# Altium PCB gamekun_H7A3.PcbDoc (part 2 of 2)
Units mil, origin at the board's own origin, x right, y up, seen from the top; angles counter-clockwise.
Board outline 2995 x 3909 mil, 4 copper layers (Top Layer, Layer 1, Layer 2, Bottom Layer), stack 23.756 mil thick; 100 components, 120 nets, 610 pads, 229 vias.
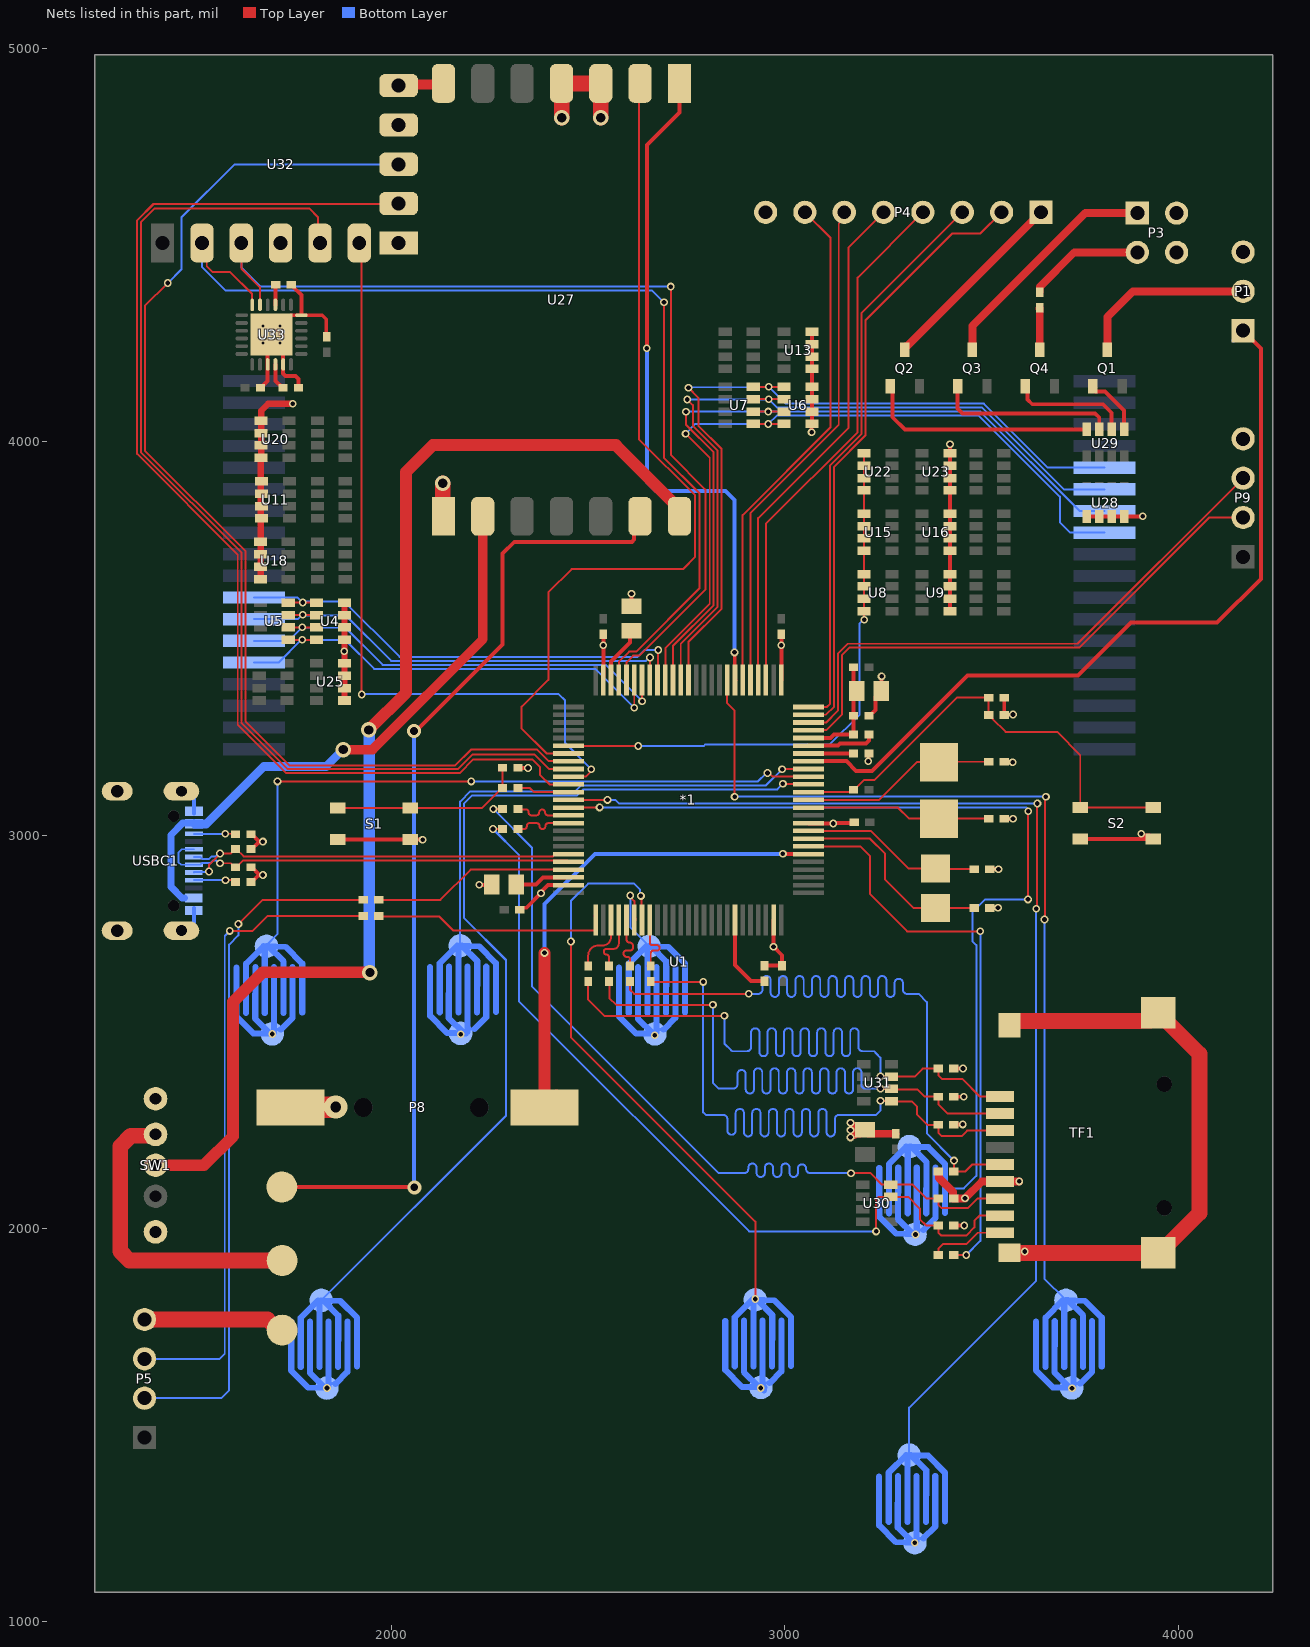
[diagram p4: the nets of this part, all layers, seen from the top]

## Via types
v1: diameter 19.68, hole 11.81, Top Layer to Bottom Layer, tented both sides, 203 vias
v2: diameter 62.99, hole 62.99, Top Layer to Bottom Layer, 9 vias
v3: diameter 39.37, hole 23.62, Top Layer to Bottom Layer, tented both sides, 7 vias
v4: diameter 19.68, hole 7.87, Top Layer to Bottom Layer, 4 vias
v5: diameter 196.85, hole 196.85, Top Layer to Bottom Layer, 2 vias
v6: diameter 35.43, hole 19.68, Top Layer to Bottom Layer, tented both sides, 2 vias
v7: diameter 35.43, hole 17.72, Top Layer to Bottom Layer, tented both sides, 1 vias
v8: diameter 59.06, hole 27.56, Top Layer to Bottom Layer, tented both sides, 1 vias

## Nets (pads, with @x,y where several pads share a name; then routed paths per layer and width w, separated by ;. In a path a pad name is that pad's centre, name@x,y a point inside that pad or via, vN(x,y) a via of type N, cw(c..) or ccw(c..) an arc to the next point about the centre after c; other vN are vias at no path point) (continued)
E8: *1.38 U1.5 U6.5 U7.4 | length 2035.1
  Top Layer w5: *1.38@2755,3395.12 2755,3492.57 2839,3576.57 2839,3982.14 2780,4041.14 2780,4112.41 2755,4137.41 v1(2755,4138) ; U7.4@2919.43,4140.24 v1(2958.78,4140.24) U6.5@2998.13,4140.24
  Bottom Layer w5: v1(2755,4138) 2756.12,4139.12 2957.66,4139.12 v1(2958.78,4140.24) 3001.78,4097.25 3505.89,4097.25 3668.51,3934.63 U1.5@3812.8,3934.63
E9: *1.39 U1.6 U6.6 U7.3 | length 2020.3
  Top Layer w5: *1.39@2735.32,3395.12 2735.32,3487.03 2829,3580.72 2829,3978 2766,4041 2766,4093.94 2752,4107.94 v1(2752,4108) ; U7.3@2919.43,4108.75 v1(2958.78,4108.75) U6.6@2998.13,4108.75
  Bottom Layer w5: v1(2752,4108) 2752.37,4108.37 2953.52,4108.37 2956.34,4111.19 2980.28,4087.25 3501.75,4087.25 3709.42,3879.58 U1.6@3812.8,3879.58
E10: *1.40 U1.7 U6.7 U7.2 | length 2001.5
  Top Layer w5: *1.40@2715.63,3395.12 2715.63,3481.49 2819,3584.86 2819,3973.86 2748.66,4044.2 v1(2748.66,4077) ; U7.2@2919.43,4077.25 v1(2958,4077.25) U6.7@2998.13,4077.25
  Bottom Layer w5: v1(2748.66,4077) 2748.78,4077.13 2957.87,4077.13 v1(2958,4077.25) 3497.09,4077.25 3749.8,3824.53 U1.7@3812.8,3824.53
E11: *1.41 U1.8 U6.8 U7.1 | length 2022.4
  Top Layer w5: *1.41@2695.94,3395.12 2695.94,3475.94 2809,3589 2809,3959.33 v1(2747.67,4020.67) ; U7.1@2919.43,4045.76 v1(2958,4045.76) U6.8@2998.13,4045.76
  Bottom Layer w5: v1(2747.67,4020.67) 2772.76,4045.76 v1(2958,4045.76) 2979.5,4067.25 3492.94,4067.25 3699,3861.2 3699,3796 3725.51,3769.49 U1.8@3812.8,3769.49
E12: *1.42 U1.26 U4.5 U5.4 | length 1248.7
  Top Layer w5: U5.4@1737.43,3591.49 U4.5@1809.18,3591.49 ; *1.42@2676.26,3395.12 2677.13,3395.99 2677.13,3470.13 v1(2678,3471)
  Bottom Layer w5: U1.26@1650,3604.51 1761.49,3604.51 v1(1774,3592) 1776.81,3594.81 1784.16,3594.81 1784.27,3594.92 1879.08,3594.92 2020.59,3453.4 2625.4,3453.4 2643,3471 v1(2678,3471)
E13: *1.43 U1.25 U4.6 U5.3 | length 1192.9
  Top Layer w5: U5.3@1737.43,3560 U4.6@1809.18,3560 ; *1.43@2656.57,3395.12 2656.79,3395.33 2656.79,3451.79 v1(2657,3452)
  Bottom Layer w5: U1.25@1650,3549.47 1761.01,3549.47 1772.54,3561 v1(1774,3561) 1775.67,3559.33 1883,3559.33 1998.93,3443.4 2646.73,3443.4 2655.32,3452 v1(2657,3452)
E14: *1.44 U1.24 U4.7 U5.2 | length 1205.1
  Top Layer w5: U5.2@1737.43,3528.5 U4.7@1809.18,3528.5 ; *1.44@2636.89,3395.12 *1.44@2636.89,3395.12 2636.94,3341.06 v1(2637,3341)
  Bottom Layer w5: U1.24@1650,3494.42 1738.42,3494.42 v1(1773,3529) 1774.33,3527.67 1883,3527.67 1977.26,3433.4 2544.6,3433.4 v1(2637,3341)
E15: *1.45 U1.23 U4.8 U5.1 | length 1205.5
  Top Layer w5: U5.1@1737.43,3497.01 U4.8@1809.18,3497.01 ; v1(2617,3324) 2617.1,3324.1 2617.1,3395.02 *1.45@2617.2,3395.12
  Bottom Layer w5: U1.23@1650,3439.37 1712.99,3439.37 1770.62,3497 v1(1773,3497) 1774,3496 1883,3496 1955.6,3423.4 2517.6,3423.4 v1(2617,3324)
G_LCD_LED: Q4.1 U29.6 | length 305.8
  Top Layer w10: Q4.1@3610.93,4141.74 3616.96,4135.71 3616.96,4108.04 3629,4096 3809,4096 3830.75,4074.25 U29.6@3830.75,4032.43
G_M5STAMP: Q2.1 U29.8 | length 588.9
  Top Layer w10: Q2.1@3267.6,4141.74 3274,4135.34 3274,4062.86 3305.61,4031.24 3766.57,4031.24 U29.8@3767.76,4032.43
G_MIC: Q1.1 U29.5 | length 156.7
  Top Layer w10: Q1.1@3782.6,4141.74 3782.6,4134.85 3789.41,4128.04 3813.96,4128.04 3862.24,4079.76 U29.5@3862.24,4032.43
G_MOTOR: Q3.1 U29.7 | length 455.9
  Top Layer w10: Q3.1@3439.26,4141.74 3439.26,4084.59 3451.86,4072 3789,4072 3799.25,4061.75 U29.7@3799.25,4032.43
GND: 1.1 *1.10 *1.26 *1.49 *1.74 *1.99 -.1 C1.2 C2.2 C3.2 C4.2 C5.2 C6.2 C7.1 C8.2 C9.1 C10.2 C11.1 C12.1 C13.1 C14.2 C15.1 C16.2 C17.2 C18.2 C19.1 C20.1 D1.2 D2.2 D3.2 D4.2 D6.2 D7.2 D8.2 D9.2 D10.2 D11.2 P1.3 P3.2 P3.4 P4.8 P5.4 P8.1 P9.4 R3.1 R4.2 R8.1 S1.1 S2.1 SW1.4 TF1.6 TF1.10 U1.102 U1.104 U1.106 U1.108 U1.110 U1.112 U1.114 U1.116 U4.1 U4.2 U4.3 U4.4 U6.1 U6.2 U6.3 U6.4 U9.1 U9.2 U9.3 U9.4 U11.1 U11.2 U11.3 U11.4 U13.1 U13.2 U13.3 U13.4 U16.1 U16.2 U16.3 U16.4 U18.1 U18.2 U18.3 U18.4 U20.1 U20.2 U20.3 U20.4 U23.1 U23.2 U23.3 U23.4 U25.1 U25.2 U25.3 U25.4 U27.1 U27.10 U27.11 U28.1 U28.2 U28.3 U28.4 U32.4 U32.7 U32.10 U33. U33.9 U33.11 U33.25 USBC1.0 USBC1.A1 USBC1.A12 USBC1.B1 USBC1.B12 | length 6969.7
  Top Layer w5: P8.1@1743.43,2308 P8.1@1744,2307.43 ; C19.1@3186.81,2234.31 3191.81,2239.31 3203,2250.5 C19.1@3204,2251.5
  Top Layer w10: R4.2@1642.69,2881 1644.65,2881 1660.8,2897.15 1671.15,2897.15 v1(1673,2899) 1671.15,2900.85 1662.8,2900.85 1644.65,2919 D3.2@1642.69,2919 ; D4.2@1642.69,2965 1644.65,2965 1661.8,2982.15 1671.15,2982.15 v1(1673,2984) 1671.15,2985.85 1661.8,2985.85 1644.65,3003 R3.1@1642.68,3003 ; U20.1@1666.69,4056.13 U20.1@1668.57,4054.24 ; C17.2@1666.69,4138 1668.65,4138 1685.16,4154.5 U33.9@1685.16,4197.21 1685.16,4263.16 U33.25@1695,4273 ; C15.1@1745.18,4400.5 C15.1@1744.68,4400 1746.65,4400 1751.5,4395.16 1751.5,4393.19 1770.79,4373.9 U33.@1770.79,4322.21 ; C18.2@1763.68,4138 1763.68,4160.31 1756,4168 1730.39,4168 1724.53,4173.86 U33.11@1724.53,4197.21 1724.53,4243.47 v4(1716.65,4251.35) U33.25@1695,4273 ; C16.2@1838,4271.69 1834,4275.69 1834,4312 1823.79,4322.21 U33.@1770.79,4322.21 ; S1.1@1863,2989 S1.1@2048,2989 v1(2079,2989) ; v1(2223,2874) 2253.5,2874 C13.1@2254.5,2875 ; D1.2@2321.69,3172 2322.19,3171.5 2346.5,3171.5 v1(2347,3171) ; C3.2@2325.69,2811 2330.53,2815.84 2342.84,2815.84 v1(2380,2853) 2380,2856 2397.46,2873.46 *1.74@2449.88,2873.46 ; *1.49@2538.46,3395.12 v1(2538.46,3483) ; v1@2538.46,3485 v1(2538.46,3483) ; C1.2@2538.46,3510.85 v1(2538.46,3483) ; C14.2@2609,3583.5 C14.2@2610,3582.5 v1(2610,3614) ; R8.1@2948,2668.68 C4.2@2993,2668.69 2993,2695 v1(2971,2717) 2971.27,2717.27 2971.27,2784.61 *1.99@2971.54,2784.88 ; C2.2@2991,3511.31 2991.11,3511.2 v1(2991.11,3483) ; v1@2991.11,3486 v1(2991.11,3483) ; *1.26@2991.75,3395.65 *1.26@2991.22,3395.12 2991.11,3395.23 v1(2991.11,3483) ; *1.10@3060.12,3030.94 3060.6,3030.46 3122.51,3030.46 v1(3123,3029.97) 3124.51,3031.49 3174.8,3031.49 C5.2@3176.31,3033 ; v1(3068,4025) 3068,4044.76 U6.1@3069,4045.76 U13.4@3069,4280.24 ; C19.1@3202.51,2251 3203,2250.5 C19.1@3212.13,2241.37 ; v1(3211.83,3188.17) 3212.76,3189.09 3212.76,3207.07 1.1@3213.68,3208 ; C12.1@3213.68,3304 3215.65,3304 3230.5,3318.84 3230.5,3352.31 C11.1@3245.18,3367 3246,3367.82 v1(3246,3404) ; U9.1@3419.43,3569.76 U16.1@3419.43,3723.26 U16.2@3419.43,3754.75 U16.3@3419.43,3786.25 U16.4@3419.43,3817.74 U23.1@3419.43,3876.76 U23.2@3419.43,3908.25 U23.3@3419.43,3939.75 U23.4@3419.43,3971.24 3420,3971.81 v1(3420,3994) ; D9.2@3429.69,2008 v1(3456,2008) ; D7.2@3429.69,2264 3430.19,2264.5 3451.5,2264.5 v1(3452,2265) ; D11.2@3429.69,2335.5 3429.94,2335.25 3454.75,2335.25 v1(3455,2335) ; D10.2@3429.69,2407 v1(3453,2407) ; C10.2@3520.69,2815 3521.19,2815.5 3541.5,2815.5 v1(3542,2816) ; C8.2@3520.69,2914 v1(3543,2914) ; C7.1@3557.68,3042 v1(3580,3042) ; C9.1@3557.68,3187 3558.68,3186 v1(3579,3186) ; C6.2@3557.69,3350 D2.2@3557.69,3306 3558.18,3306.5 3579.5,3306.5 v1(3580,3307) ; TF1.10@3571.3,1938.35 TF1.10@3574.95,1942 ; S2.1@3751,2991 S2.1@3936,2991 3927.22,2999.78 3912.84,2999.78 3908.62,3004 v1(3906,3004) ; U28.1@3767.76,3810.57 U28.2@3799.25,3810.57 U28.3@3830.75,3810.57 U28.4@3862.24,3810.57 3909.57,3810.57 v1(3910,3811) ; TF1.10@3910.95,1973.35 TF1.10@3945.95,1938.35 ; U33.25@1695,4273 v4(1716.65,4294.65) 1744.13,4322.13 1770.71,4322.13 U33.@1770.79,4322.21 ; TF1.10@3945.95,1938.35 TF1.10@3949.25,1938.35 TF1.10@3945.95,1938.35
  Top Layer w15: v1(3167,2232) 3168.27,2232 3172.08,2235.81 3177.12,2235.81 3180.62,2239.31 C19.1@3191.81,2239.31 ; v1(3167,2250.5) 3167.5,2251 C19.1@3202.51,2251 ; v1(3167,2269) 3168.27,2269 3173.59,2263.68 3191.81,2263.68 C19.1@3204,2251.5
  Top Layer w15.75: U18.4@1666.57,3651.26 1667.57,3652.26 U11.1@1667.57,3899.99 ; U11.1@1669.57,3899.99 U11.1@1667.57,3899.99 ; v1(1749,4097) 1686,4097 1668.57,4079.57 U20.1@1668.57,4054.24 U20.2@1668.57,4022.75 U20.3@1668.57,3991.25 U20.4@1668.57,3959.76 1667.57,3958.76 U11.1@1667.57,3899.99 ; U25.1@1880.05,3342.76 U25.2@1880.05,3374.25 U25.3@1880.05,3405.75 U25.4@1880.05,3437.24 U4.1@1880.05,3497.01 U4.2@1880.05,3528.5 U4.3@1880.05,3560 U4.4@1880.05,3591.49 ; U27.1@2130,3812.93 U27.1@2132.02,3810.91
  Top Layer w20: C19.1@3212.13,2241.37 C20.1@3282,2241.37 ; D6.2@3392.13,2144.84 3392.13,2128.87 3427.87,2093.13 3427.87,2076.66 3428.03,2076.5 D8.2@3429.69,2076.5 ; D8.2@3429.94,2076.75 3457.75,2076.75 v1(3458,2077) 3500.45,2119.45 TF1.6@3546.61,2119.45 3595.29,2119.45 v1(3595.91,2120.07)
  Top Layer w40: P5.4@1372,1769 1684.52,1769 1711.52,1742 -.1@1722,1742 ; U27.1@2130,3812.93 v3(2130,3895) ; v3(2433,4824.02) 2433,4910.68 U27.11@2432.02,4911.65 U27.10@2532.02,4911.65 v3(2532,4824.02) ; TF1.10@3571.3,1938.35 3945.95,1938.35 TF1.10@3949.25,1938.35 3952.56,1938.35 4054,2039.79 4054,2443.83 3972.56,2525.28 3972.56,2528.58 3952.56,2548.58 TF1.10@3949.25,2548.58 3929.25,2528.58 3903.1,2528.58 3902.51,2528 TF1.10@3591.48,2528 ; TF1.10@3571.3,2517.09 TF1.10@3571.3,2521.02
  Top Layer w55: P8.1@1744,2307.43 1745.07,2308.5 1857.5,2308.5 v8(1858,2309)
  Bottom Layer w5: U1.114@1696.61,2495.2 v1(1696.81,2495.01)
  Bottom Layer w10: USBC1.0@1465.94,2757.83 1477.52,2757.83 1497.37,2777.69 USBC1.A1@1497.37,2803.11 USBC1.B12@1497.37,2814.92 ; USBC1.0@1465.94,3112.17 1477.51,3112.17 1497.43,3092.24 USBC1.A12@1497.43,3066.89 USBC1.B1@1497.43,3055.08
  Bottom Layer w15.75: U1.108@2939.17,1596.38 U1.108@2946.8,1588.75 ; U1.108@2943.5,1600.71 U1.108@2947.83,1596.38 ; U1.102@3326.22,1985.87 3331.13,1985.87 v1(3332,1985)
  other v1: 3330.51,1201.46 3730,1594 1835.79,1594.81 2939,1595 3610,1942 2669,2492 2176,2494 1880,3468
  other v4: 1673.35,4251.35 1673.35,4294.65
I2C2_SCL: *1.46 U32.3 U33.23 | length 2480
  Top Layer w5: U32.3@1617.98,4505.98 1617.98,4441.02 1665.47,4393.53 U33.23@1665.47,4348.79 ; *1.46@2597.52,3395.12 2597.52,3440.52 2614,3457 2630.14,3457 2798,3624.86 2798,3879 2710,3967 v1(2710,4395)
  Bottom Layer w5: U32.3@1617.98,4505.98 1617.98,4444.02 1667,4395 v1(2710,4395)
I2C2_SDA: *1.47 U32.2 U33.24 | length 2601.8
  Top Layer w5: U32.2@1517.98,4505.98 1530.25,4493.72 1530.25,4446.75 1545,4432 1590,4432 1645.79,4376.21 U33.24@1645.79,4348.79 ; *1.47@2577.92,3395.04 *1.47@2577.83,3395.12 2577.83,3440.83 2604,3467 2622,3467 2783,3628 2783,3870 2692.66,3960.34 v1(2692.66,4355)
  Bottom Layer w5: U32.2@1517.98,4505.98 1517.98,4446.02 1579,4385 2662.66,4385 v1(2692.66,4355)
KEY1: *1.15 U1.115 | length 2399.1
  Top Layer w5: v1(2995,3131) 2995.82,3130.18 3059.3,3130.18 *1.15@3060.12,3129.37
  Bottom Layer w5: U1.115@1821.42,1817.64 2291,2287.22 2291,2683 2184.57,2789.43 2184.57,3081.42 2204.83,3101.69 2471.69,3101.69 2487,3117 2981,3117 v1(2995,3131)
KEY2: *1.16 U1.113 | length 1797.8
  Top Layer w5: v1(1710,3137) v1(2203,3137) ; v1(2956,3158.34) 2959.97,3158.34 2969.26,3149.06 *1.16@3060.12,3149.06
  Bottom Layer w5: U1.113@1686.77,2718.03 U1.113@1682.24,2718.03 1682.24,2721.17 1710,2748.93 v1(1710,3137) ; v1(2203,3137) 2931.73,3137 2953.07,3158.34 v1(2956,3158.34)
KEY3: *1.17 U1.111 | length 1286.4
  Top Layer w5: v1(2993,3168) 2993.37,3168.37 3059.75,3168.37 *1.17@3060.12,3168.74
  Bottom Layer w5: U1.111@2174.57,2719.21 2174.57,3085.57 2200.69,3111.69 2467.54,3111.69 2482.86,3127 2952,3127 v1(2993,3168)
KEY4: *1.81 U1.109 | length 213
  Top Layer w5: v1(2607,2847) 2607,2843.03 2617.2,2832.82 2617.2,2788.8 *1.81@2618,2788
  Top Layer w10: *1.81@2617.2,2784.88 2617.2,2787.2 *1.81@2618,2788
  Bottom Layer w5: v1(2607,2847) 2607,2766.11 2647.6,2725.51 U1.109@2647.6,2717.84
KEY5: *1.82 U1.107 | length 1487.4
  Top Layer w5: v1(2456,2730) 2456,2487 2925,2018 v1(2925,1821) ; v1(2634,2846) 2635.44,2844.56 2635.44,2786.33 *1.82@2636.89,2784.88
  Bottom Layer w5: v1(2456,2730) 2456,2833 2500,2877 2617,2877 2631.19,2862.81 2631.19,2848.81 v1(2634,2846) ; U1.107@2923.29,1819.21 U1.107@2924.8,1819.21
KEY6: *1.33 U1.105 | length 2405.1
  Top Layer w5: *1.33@2853.43,3395.12 2853.43,3335.9 2872.16,3317.17 v1(2872.16,3098.34) ; v1(3660,2786) 3661.83,2787.83 3661.83,3096.51 v1(3663.66,3098.34)
  Bottom Layer w5: v1(2872.16,3098.34) v1(3663.66,3098.34) ; v1(3660,2786) 3660,1872.76 3712.5,1820.26 3717.03,1820.26 U1.105@3719.29,1817.99
KEY7: *1.63 U1.103 | length 2987.5
  Top Layer w5: *1.63@2449.88,3090 v1(2549,3090) ; v1(3639,2813) 3640.5,2814.5 3640.5,3079.5 v1(3642,3081)
  Bottom Layer w5: v1(2549,3090) 2569,3090 2578,3081 v1(3642,3081) ; U1.103@3316.14,1424.29 3316.14,1545.14 3639,1868 v1(3639,2813)
KEY8: *1.64 U1.101 | length 2322.8
  Top Layer w5: *1.64@2449.88,3070.32 2450.22,3070.66 2528.66,3070.66 v1(2529,3071) ; v1(3618,2837) 3618.5,2837.5 3618.5,3060.5 v1(3619,3061)
  Bottom Layer w5: v1(2529,3071) 3614,3071 3619.43,3065.57 3619.43,3061.43 v1(3619,3061) ; 3407.48,2102.15 3455.15,2102.15 3487,2134 3487,2721 3477,2731 3477,2804 3510,2837 v1(3618,2837)
KEY_H: *1.62 R2.1 | length 134.9
  Top Layer w5: R2.1@2321.68,3120 2352,3120 2362.32,3109.68 *1.62@2449.88,3109.68 *1.62@2448.2,3108
L_OSC_IN: *1.8 C10.1 Y2.1 | length 533.2
  Top Layer w5: *1.8@3060.12,2991.57 3216.43,2991.57 3255,2953 3255,2887 3327.2,2814.8 Y2.1@3383,2814.8 3481.12,2814.8 C10.1@3481.32,2815
L_OSC_OUT: *1.9 C8.1 Y2.2 | length 461.5
  Top Layer w5: *1.9@3060.12,3011.26 3218.74,3011.26 3314.8,2915.2 Y2.2@3383,2915.2 3384.2,2914 C8.1@3481.32,2914
M5_POWER: P4.1 Q2.3 | length 494.9
  Top Layer w20: Q2.3@3305,4234.26 3305,4241.15 3306.81,4242.96 3309.96,4242.96 P4.1@3651,4584
M5_SPI6_MISO: *1.30 P4.6 | length 1287.7
  Top Layer w5: *1.30@2912.48,3395.12 2912.48,3819.34 3137,4043.86 3137,4555.37 3151,4569.37 P4.6@3151,4584
M5_SPI6_MOSI: *1.31 P4.7 | length 1308.3
  Top Layer w5: *1.31@2892.8,3395.12 2892.8,3813.8 3116,4037 3116,4519 P4.7@3051,4584
M5_SPI6_NSS: *1.28 P4.4 | length 1354.2
  Top Layer w5: *1.28@2951.85,3395.12 2951.85,3791.85 3185,4025 3185,4418 P4.4@3351,4584
M5_SPI6_SCK: *1.29 P4.5 | length 1320.9
  Top Layer w5: *1.29@2932.17,3395.12 2932.17,3806.17 3162,4036 3162,4495 P4.5@3251,4584
M5_USART2_RX: *1.25 P4.3 | length 1446.7
  Top Layer w5: *1.25@3060.12,3326.22 3106.22,3326.22 3115,3335 3115,3940.86 3195,4020.86 3195,4328 P4.3@3451,4584
M5_USART2_TX: *1.24 P4.2 | length 1548.8
  Top Layer w5: *1.24@3060.12,3306.54 3104.28,3306.54 3125,3327.26 3125,3936.72 3205,4016.72 3205,4309.86 3425.14,4530 3497,4530 P4.2@3551,4584
MIC_SIGNAL: *1.18 P1.1 | length 2046.5
  Top Layer w10: *1.18@3060.12,3188.43 3156.57,3188.43 3181,3164 3222,3164 3464,3406 3745,3406 3880,3541 4099,3541 4210,3652 4210,4238 P1.1@4165,4283
  Bottom Layer w10: P1.1@4140.47,4258.47 P1.1@4165,4283
Net1_2: 1.2 *1.19 | length 114.2
  Top Layer w5: 1.2@3174.2,3208.11 1.2@3174.31,3208
  Top Layer w10: *1.19@3060.12,3208.11 1.2@3174.2,3208.11
Net*1_12: *1.12 C7.2 Y1.2 | length 469.9
  Top Layer w5: *1.12@3060.12,3070.32 3287.68,3070.32 3315.85,3042.15 Y1.2@3392,3042.15 3518.17,3042.15 C7.2@3518.31,3042
Net*1_13: *1.13 C9.2 Y1.1 | length 498.4
  Top Layer w5: *1.13@3060.12,3090 3240,3090 3335.85,3185.85 Y1.1@3392,3185.85 3393.15,3187 C9.2@3518.31,3187
Net*1_20: *1.20 R10.2 | length 174.2
  Top Layer w10: *1.20@3060.12,3227.8 3134.8,3227.8 3140,3233 3206,3233 3213.69,3240.69 R10.2@3213.69,3256
Net*1_48: *1.48 C14.1 | length 145.9
  Top Layer w10: *1.48@2558.15,3395.12 2558.15,3442.15 2606.68,3490.68 2606.68,3516.18 C14.1@2610,3519.5
Net*1_56: *1.56 U8.5 U8.6 U8.7 U8.8 U15.5 U15.6 U15.7 U15.8 U22.5 U22.6 U22.7 U22.8 | length 1445
  Top Layer w5: *1.56@2449.88,3227.8 2450.28,3227.4 2626.6,3227.4 v1(2627,3227) ; U22.5@3201.57,3971.24 U22.6@3201.57,3939.75 U22.7@3201.57,3908.25 U22.8@3201.57,3876.76 U15.5@3201.57,3817.74 U15.6@3201.57,3786.25 U15.7@3201.57,3754.75 U15.8@3201.57,3723.26 U8.5@3201.57,3664.24 U8.6@3201.57,3632.75 U8.7@3201.57,3601.25 U8.8@3201.57,3569.76 3201.57,3548.43 v1(3202,3548)
  Bottom Layer w5: v1(2627,3227) 2794,3227 2798,3231 3114.43,3231 3190,3306.57 3190,3539 3199,3548 v1(3202,3548)
Net*1_73: *1.73 C13.2 | length 139.9
  Top Layer w10: C13.2@2317.5,2875 2367,2875 2385.15,2893.15 *1.73@2449.88,2893.15
Net*1_94: *1.94 R8.2 | length 206.7
  Top Layer w10: *1.94@2873.11,2784.88 2873.11,2669.89 2913.69,2629.31 R8.2@2948,2629.31
NetC15_2: C15.2 U33.21 | length 51.4
  Top Layer w5: C15.2@1704.84,4399.53 C15.2@1705.31,4400
  Top Layer w10: U33.21@1704.84,4348.79 C15.2@1704.84,4399.53
NetC18_1: C18.1 U33.10 | length 68.4
  Top Layer w10: U33.10@1704.84,4197.21 1704.84,4155.5 1722.35,4138 C18.1@1724.32,4138
NetD1_1: D1.1 R2.2 S1.2 | length 504.6
  Top Layer w5: S1.2@1863,3069 S1.2@2048,3069 ; S1.2@2048.19,3069 2229.35,3069 2280.35,3120 R2.2@2282.31,3120 D1.1@2282.32,3172 2280.35,3172 D1.1@2273,3164.66
NetP1_2: P1.2 Q1.3 | length 455.7
  Top Layer w20: Q1.3@3820,4234.26 3820,4318 3885,4383 P1.2@4165,4383
NetP3_1: P3.1 Q3.3 | length 598.8
  Top Layer w20: Q3.3@3476.67,4234.26 3476.67,4294.67 3764,4582 P3.1@3896,4582
NetP3_3: P3.3 R7.1 | length 297.8
  Top Layer w20: R7.1@3648,4380.69 3648,4394 3736,4482 P3.3@3896,4482
NetP5_2: P5.2 R5.2 | length 1761.6
  Top Layer w5: v1(1610.72,2774.34) 1672.38,2836 R5.2@1928.31,2836
  Bottom Layer w5: P5.2@1372,1569 1567,1569 1587,1589 1587,2722 1610.72,2745.72 v1(1610.72,2774.34)
NetP5_3: P5.3 R6.2 | length 1644.8
  Top Layer w5: v1(1589,2757) 1647,2757 1685,2795 R6.2@1928.31,2795
  Bottom Layer w5: P5.3@1372,1669 1563,1669 1576,1682 1576,2744 v1(1589,2757)
NetP6_1: TS.1 U27.6 | length 2457
  Top Layer w10: TS.1@1721,2106 1721.5,2105.5 2057.5,2105.5 v6(2058,2105) ; v6@2057,3260 2282,3485 2282,3716 2312,3746 2610.91,3746 2616.77,3751.86 2616.77,3795.65 U27.6@2632.02,3810.91
  Bottom Layer w10: v6@2057,3260 2057.5,3259.5 2057.5,2105.5 v6(2058,2105)
  other v6: 2057,3264.97
NetP7_1: +.1 SW1.1 | length 796.4
  Top Layer w40: SW1.1@1403.83,2235.91 SW1.1@1400,2239.74 1396.17,2235.91 1336.91,2235.91 1310,2209 1310,1942.43 1333.43,1919 +.1@1722,1919
NetQ4_3: Q4.3 R7.2 | length 109.8
  Top Layer w20: R7.2@3647.33,4338.99 3648,4339.66 R7.2@3648,4341.31 3648.16,4341.16 3648.16,4234.44 Q4.3@3648.33,4234.26
NetR3_2: R3.2 USBC1.B5 | length 106.3
  Top Layer w5: v1(1577,3004) 1602.31,3004 R3.2@1603.31,3003
  Bottom Layer w5: USBC1.B5@1497.43,3003.9 1576.9,3003.9 v1(1577,3004)
NetR4_1: R4.1 USBC1.A5 | length 108
  Top Layer w5: v1(1578,2886) 1598.32,2886 R4.1@1603.32,2881
  Bottom Layer w5: USBC1.A5@1497.45,2885.79 1547.21,2885.79 1577.79,2885.79 v1(1578,2886)
NetR17_1: R17.1 TF1.9 | length 188.7
  Top Layer w5: R17.1@3390.32,1933 3390.32,1948.32 3403,1961 3462,1961 3490.53,1989.53 TF1.9@3546.61,1989.53
NetSW1_2: SW1.2 U27.7 | length 3077.9
  Top Layer w30: SW1.2@1400,2161 1523,2161 1597,2235 1597,2577 1672,2652 1944,2652 v3(1945,2651) ; v3(1942,3268) 2037,3363 2037,3924 2105,3992 2570.61,3992 2732.02,3830.59 U27.7@2732.02,3810.91
  Top Layer w40: SW1.2@1396.17,2157.17 SW1.2@1400,2161
  Bottom Layer w30: v3(1942,3268) 1943.5,3266.5 1943.5,2652.5 v3(1945,2651)
NRST: *1.14 C6.1 D2.1 R1.2 S2.2 | length 1198.6
  Top Layer w5: *1.14@3060.12,3109.68 3164.03,3109.68 3172.35,3118 R1.2@3174.31,3118 ; S2.2@3936,3071 S2.2@3751,3071 3751,3204 3692,3263 3561.32,3263 3527.63,3296.69 3527.63,3298.66 3520.28,3306 D2.1@3518.32,3306 C6.1@3518.32,3350 3437,3350 3228,3141 3201.28,3141 R1.2@3176.28,3116 ; R1.2@3176.28,3116 R1.2@3174.31,3116 R1.2@3176.28,3116
PWR_CTL: *1.57 U27.9 | length 2194.4
  Top Layer w5: *1.57@2449.88,3208.11 2394.03,3208.11 2331,3271.14 2331,3327 2399,3395 2399,3618 2458,3677 2741,3677 2772,3708 2772,3864 2629,4007 2629,4908.63 U27.9@2632.02,4911.65
PWR_VO: *1.32 U27.8 | length 1748.7
  Top Layer w10: v1(2649,4238) 2649,4755 2732.02,4838.02 U27.8@2732.02,4911.65 ; v1(2872,3465) 2872.56,3464.44 2872.56,3395.67 *1.32@2873.11,3395.12 *1.32@2874.02,3394.21
  Bottom Layer w10: v1(2649,4238) 2649,3898 2672,3875 2849,3875 2872,3852 v1(2872,3465)
SAI2_FS_A: *1.59 U32.5 | length 2832.2
  Top Layer w5: U32.5@1817.98,4505.98 1813,4510.97 1813,4572 1791,4594 1398,4594 1363,4559 1363,3973.86 1619,3717.86 1619,3285.14 1736.14,3168 2168.86,3168 2206.86,3206 2363,3206 2400.26,3168.74 *1.59@2449.88,3168.74
SAI2_SCK_A: *1.60 U32.6 | length 1946.1
  Top Layer w5: U32.6@1917.98,4505.98 1924,4499.97 v1(1924,3358) ; *1.60@2449.88,3149.06 2493.94,3149.06 2505.19,3160.3 2505.19,3165.19 v1(2508,3168)
  Bottom Layer w5: v1(1924,3358) 1925,3359 2425,3359 2441,3343 2441,3235 v1(2508,3168)
SAI2_SD_A: *1.58 U32.9 | length 2930
  Top Layer w5: v1(1431,4404) 1373,4346 1373,3978 1629,3722 1629,3289.28 1740.28,3178 2162,3178 2202,3218 2370,3218 2399.57,3188.43 *1.58@2449.88,3188.43
  Bottom Layer w5: v1(1431,4404) 1466,4439 1466,4571 1601,4706 U32.9@2018,4706
SD_CK: *1.80 R11.2 | length 154.6
  Top Layer w5: *1.80@2597.52,2784.88 2597.52,2735.48 ccw(c2606,2735.48) 2606,2727 cw(c2606,2719) 2614,2719 2614,2715 cw(c2606,2715) 2606,2707 2597.1,2707 ccw(c2597.1,2699.45) 2589.55,2699.45 ccw(c2598,2699.45) 2598,2691 2600,2691 cw(c2600,2685) 2606,2685 R11.2@2606,2667.69
SD_CMD: *1.83 R12.2 | length 161.2
  Top Layer w5: R12.2@2651,2667.69 R12.2@2656.57,2673.26 ; *1.83@2656.57,2784.88 2656.57,2726.43 ccw(c2662,2726.43) 2662,2721 2674.61,2721 cw(c2674.61,2714.31) 2681.25,2713.48 ccw(c2686.2,2712.79) 2681.21,2713 cw(c2675,2713.21) 2675,2707 2666,2707 ccw(c2666,2700) 2659,2700 R12.2@2659,2667.69
SD_D0: *1.65 R13.2 | length 157.8
  Top Layer w5: R13.2@2318.69,3067 2319.75,3065.93 2341.84,3065.93 cw(c2341.84,3059.77) 2348,3059.77 2348,3059 ccw(c2356.37,3059) 2356.37,3050.63 2365.43,3050.63 2367.94,3050.63 ccw(c2367.94,3058.13) 2375.44,3058.13 cw(c2382.94,3058.13) 2390.44,3058.13 ccw(c2397.94,3058.13) 2397.94,3050.63 2409.82,3050.63 *1.65@2449.88,3050.63
SD_D1: *1.66 R14.2 | length 154.4
  Top Layer w5: R14.2@2321.69,3016 2337,3016 ccw(c2337,3023) 2344,3023 2344,3024.19 cw(c2350.76,3024.19) 2350.76,3030.94 2351.22,3030.94 2368.73,3030.94 cw(c2368.73,3023.44) 2376.23,3023.44 ccw(c2383.73,3023.44) 2391.23,3023.44 cw(c2398.73,3023.44) 2398.73,3030.94 2410.75,3030.94 *1.66@2449.88,3030.94
SD_D2: *1.78 R15.2 | length 154.9
  Top Layer w5: R15.2@2500,2667.69 2500,2693.98 cw(c2526.02,2693.98) 2526.02,2720 2536.6,2720 ccw(c2536.6,2741.55) 2558.15,2741.55 *1.78@2558.15,2784.88
SD_D3: *1.79 R16.2 | length 154.1
  Top Layer w5: R16.2@2553,2667.69 2553,2690 ccw(c2546,2690) 2546,2697 cw(c2546,2703.06) 2539.94,2703.06 2539.94,2705.13 cw(c2545.81,2705.13) 2545.81,2711 2564,2711 ccw(c2564,2724.83) 2577.83,2724.83 *1.79@2577.83,2784.88
SD_DET: *1.7 R17.2 | length 1452.4
  Top Layer w5: *1.7@3060.12,2971.89 3060.17,2971.94 3192.06,2971.94 3216,2948 3216,2851 3311,2756 v1(3497,2756) ; R17.2@3429.69,1933 v1(3461,1933)
  Bottom Layer w5: v1(3461,1933) 3497,1969 v1(3497,2756)
SD_SLOT_CLK: D6.1 R11.1 TF1.5 | length 2135.3
  Top Layer w5: R11.1@2606,2628.32 2606,2608 2617,2597 v1(2908,2597) ; v1(3430,2173) 3430,2145.31 D6.1@3429.68,2145 3458,2145 3475.76,2162.76 TF1.5@3546.61,2162.76
  Bottom Layer w5: v1(2908,2597) 2930,2597 2932.5,2597 ccw(c2932.5,2607.5) 2943,2607.5 2943,2631.66 cw(c2953.5,2631.66) 2964,2631.66 2964,2599.63 ccw(c2974.5,2599.63) 2985,2599.63 2985,2631.66 cw(c2995.5,2631.66) 3006,2631.66 3006,2599.63 ccw(c3016.5,2599.63) 3027,2599.63 3027,2631.66 cw(c3037.5,2631.66) 3048,2631.66 3048,2599.63 ccw(c3058.5,2599.63) 3069,2599.63 3069,2631.66 cw(c3079.5,2631.66) 3090,2631.66 3090,2599.63 ccw(c3100.5,2599.63) 3111,2599.63 3111,2631.66 cw(c3121.5,2631.66) 3132,2631.66 3132,2599.63 ccw(c3142.5,2599.63) 3153,2599.63 3153,2631.66 cw(c3163.5,2631.66) 3174,2631.66 3174,2599.63 ccw(c3184.5,2599.63) 3195,2599.63 3195,2631.66 cw(c3205.5,2631.66) 3216,2631.66 3216,2599.63 ccw(c3226.5,2599.63) 3237,2599.63 3237,2631.66 cw(c3247.5,2631.66) 3258,2631.66 3258,2599.63 ccw(c3268.5,2599.63) 3279,2599.63 3279,2624.69 cw(c3289.5,2624.69) 3300,2624.69 3300,2607.5 ccw(c3310.5,2607.5) 3310.5,2597 3334,2597 3340,2597 3361,2576 3361,2242 v1(3430,2173)
SD_SLOT_CMD: D7.1 R12.1 TF1.3 U31.1 | length 2135.3
  Top Layer w5: R12.1@2659,2628.32 2659.97,2627.34 v1(2792.34,2627.34) ; v1@3244,2325 3270.19,2325 U31.1@3271.43,2323.76 ; U31.1@3268.81,2321.13 U31.1@3271.43,2323.76 ; TF1.3@3546.61,2249.37 3463.45,2249.37 3449.16,2235.07 3398.93,2235.07 3390.32,2243.68 D7.1@3390.32,2264 3362,2264 3336,2290 3336,2310 3322.24,2323.76 U31.1@3271.43,2323.76
  Bottom Layer w5: v1(2792.34,2627.34) 2792.34,2295.66 2799,2289 2813.5,2289 2843.5,2289 cw(c2843.5,2278.5) 2854,2278.5 2854,2249.16 ccw(c2864.5,2249.16) 2875,2249.16 2875,2293.94 cw(c2885.5,2293.94) 2896,2293.94 2896,2245 ccw(c2906.5,2245) 2917,2245 2917,2293.94 cw(c2927.5,2293.94) 2938,2293.94 2938,2245 ccw(c2948.5,2245) 2959,2245 2959,2293.94 cw(c2969.5,2293.94) 2980,2293.94 2980,2245 ccw(c2990.5,2245) 3001,2245 3001,2293.94 cw(c3011.5,2293.94) 3022,2293.94 3022,2245 ccw(c3032.5,2245) 3043,2245 3043,2293.94 cw(c3053.5,2293.94) 3064,2293.94 3064,2245 ccw(c3074.5,2245) 3085,2245 3085,2293.94 cw(c3095.5,2293.94) 3106,2293.94 3106,2245 ccw(c3116.5,2245) 3127,2245 3127,2278.5 cw(c3137.5,2278.5) 3137.5,2289 3224,2289 3232,2289 3243,2300 v1(3243,2325)
SD_SLOT_D0: D8.1 R13.1 TF1.7 U30.4 | length 2135.3
  Top Layer w5: v1(2259,3067) R13.1@2282.32,3067 ; v1(3168,2141) 3218,2141 3247.01,2111.99 U30.4@3269.05,2111.99 3325.01,2111.99 3326.98,2110.02 3360.5,2076.5 D8.1@3390.32,2076.5 3390.32,2060.68 3398,2053 3466,2053 3489.14,2076.14 TF1.7@3546.61,2076.14
  Bottom Layer w5: v1(2259,3067) 2357,2969 2357,2616 2832,2141 2894,2141 2896.5,2141 ccw(c2896.5,2151.5) 2907,2151.5 2907,2155.07 cw(c2917.5,2155.07) 2928,2155.07 2928,2141.78 ccw(c2938.5,2141.78) 2949,2141.78 2949,2155.07 cw(c2959.5,2155.07) 2970,2155.07 2970,2141.78 ccw(c2980.5,2141.78) 2991,2141.78 2991,2155.07 cw(c3001.5,2155.07) 3012,2155.07 3012,2141.78 ccw(c3022.5,2141.78) 3033,2141.78 3033,2153.06 cw(c3043.5,2153.06) 3054,2153.06 3054,2151.5 ccw(c3064.5,2151.5) 3064.5,2141 3083,2141 v1(3168,2141)
SD_SLOT_D1: D9.1 R14.1 TF1.8 U30.3 | length 2135.8
  Top Layer w5: v1(2258,3016) R14.1@2282.32,3016 ; v1(3232,1993) 3232,2074 3238.5,2080.5 U30.3@3269.05,2080.5 3313.5,2080.5 3343,2051 3343,2024 3359,2008 D9.1@3390.32,2008 3390.32,1989.68 3397,1983 3462,1983 3482,2003 3482,2020 3494.83,2032.83 TF1.8@3546.61,2032.83
  Bottom Layer w5: v1(2258,3016) 2324,2950 2324,2578 2909,1993 v1(3232,1993)
SD_SLOT_D2: D10.1 R15.1 TF1.1 U31.3 | length 2135.3
  Top Layer w5: R15.1@2500,2628.32 2500,2582 2541,2541 2846,2541 v1(2846.34,2541.34) ; v1@3244,2387 3271.18,2387 U31.3@3271.43,2386.75 3329.75,2386.75 3350,2407 D10.1@3390.32,2407 3390.32,2389.68 3399,2381 3451,2381 3496.02,2335.98 TF1.1@3546.61,2335.98
  Bottom Layer w5: v1(2846.34,2541.34) 2846.34,2470.66 2863.61,2453.39 2866,2451 2903.71,2451 ccw(c2903.71,2461.5) 2914.21,2461.5 2914.21,2498.91 cw(c2924.71,2498.91) 2935.21,2498.91 2935.21,2448.81 ccw(c2945.71,2448.81) 2956.21,2448.81 2956.21,2498.99 cw(c2966.71,2498.99) 2977.21,2498.99 2977.21,2448.81 ccw(c2987.71,2448.81) 2998.21,2448.81 2998.21,2498.99 cw(c3008.71,2498.99) 3019.21,2498.99 3019.21,2448.81 ccw(c3029.71,2448.81) 3040.21,2448.81 3040.21,2498.99 cw(c3050.71,2498.99) 3061.21,2498.99 3061.21,2448.81 ccw(c3071.71,2448.81) 3082.21,2448.81 3082.21,2498.99 cw(c3092.71,2498.99) 3103.21,2498.99 3103.21,2448.81 ccw(c3113.71,2448.81) 3124.21,2448.81 3124.21,2498.99 cw(c3134.71,2498.99) 3145.21,2498.99 3145.21,2448.81 ccw(c3155.71,2448.81) 3166.21,2448.81 3166.21,2498.99 cw(c3176.71,2498.99) 3187.21,2498.99 3187.21,2461.5 ccw(c3197.71,2461.5) 3197.71,2451 3227,2451 3231.71,2446.29 3243,2435 v1(3243,2387)
SD_SLOT_D3: D11.1 R16.1 TF1.2 U31.2 | length 2135.3
  Top Layer w5: R16.1@2553,2628.32 2554,2627.31 2554,2586 2571.34,2568.66 2816.66,2568.66 v1(2817,2569) ; v1@3243,2355 3271.18,2355 U31.2@3271.43,2355.25 3272.69,2354 3337,2354 3355.5,2335.5 D11.1@3390.32,2335.5 3390.32,2316.68 3414.32,2292.68 TF1.2@3546.61,2292.68
  Bottom Layer w5: v1(2817,2569) 2817,2371 2832,2356 2841,2356 2869,2356 ccw(c2869,2366.5) 2879.5,2366.5 2879.5,2392.97 cw(c2890,2392.97) 2900.5,2392.97 2900.5,2353.94 ccw(c2911,2353.94) 2921.5,2353.94 2921.5,2397.27 cw(c2932,2397.27) 2942.5,2397.27 2942.5,2353.94 ccw(c2953,2353.94) 2963.5,2353.94 2963.5,2397.27 cw(c2974,2397.27) 2984.5,2397.27 2984.5,2353.94 ccw(c2995,2353.94) 3005.5,2353.94 3005.5,2397.27 cw(c3016,2397.27) 3026.5,2397.27 3026.5,2353.94 ccw(c3037,2353.94) 3047.5,2353.94 3047.5,2397.27 cw(c3058,2397.27) 3068.5,2397.27 3068.5,2353.94 ccw(c3079,2353.94) 3089.5,2353.94 3089.5,2397.27 cw(c3100,2397.27) 3110.5,2397.27 3110.5,2353.94 ccw(c3121,2353.94) 3131.5,2353.94 3131.5,2397.27 cw(c3142,2397.27) 3152.5,2397.27 3152.5,2353.94 ccw(c3163,2353.94) 3173.5,2353.94 3173.5,2397.27 cw(c3184,2397.27) 3194.5,2397.27 3194.5,2366.5 ccw(c3205,2366.5) 3205,2356 3228.5,2356 v1(3243,2356)
SWCLK: *1.76 R6.1 | length 602.8
  Top Layer w5: R6.1@1967.68,2795 1969.68,2793 2122,2793 2157,2758 2515.37,2758 2518.78,2761.41 2518.78,2791.59 *1.76@2515.37,2795
SWDIO: *1.72 R5.1 | length 519.4
  Top Layer w5: R5.1@1962.27,2836 2124,2836 2200.83,2912.83 *1.72@2449.88,2912.83
TAS_EN: *1.61 U32.8 | length 3016.7
  Top Layer w5: U32.8@2018,4606 2017,4605 1394.86,4605 1353,4563.14 1353,3969.72 1609,3713.72 1609,3281 1732,3158 2173,3158 2208,3193 2358,3193 2378,3173 2378,3153 2401.63,3129.37 *1.61@2449.88,3129.37
  Bottom Layer w5: U32.8@2017,4607 U32.8@2018,4606
UART4_RX: *1.23 P9.3 | length 1447.1
  Top Layer w5: *1.23@3060.12,3286.85 3104.85,3286.85 3135,3317 3135,3462 3160,3487 3744,3487 P9.3@4165,3908
UART4_TX: *1.22 P9.2 | length 1417.3
  Top Layer w5: *1.22@3060.12,3267.17 3105.17,3267.17 3145,3307 3145,3457.86 3164.14,3477 3748.14,3477 4079.14,3808 P9.2@4165,3808
UBS_N: *1.70 D4.1 USBC1.A7 USBC1.B7 | length 1072.6
  Top Layer w5: v1(1536,2908) 1536,2925.68 v1(1564,2953.68) 1591.08,2953.68 1594,2956.61 1594,2957.66 1601.35,2965 1605.28,2965 1623.94,2946.34 1978.93,2946.34 2410.56,2946.35 2416.42,2952.2 *1.70@2449.88,2952.2
  Bottom Layer w5: USBC1.B7@1497.36,2905.47 1498.62,2906.73 1534.73,2906.73 v1(1536,2908) ; USBC1.A7@1497.37,2944.84 1514.1,2944.84 1518.93,2940.01 1536.34,2940.01 1542.67,2946.34 1553.73,2946.34 1561.07,2953.68 v1(1564,2953.68)
UBS_P: *1.71 D3.1 USBC1.A6 USBC1.B6 | length 1082.3
  Top Layer w5: v1(1564,2929) 1584.75,2929 1591.35,2929 1601.35,2919 1605.28,2919 1612.63,2926.34 1622.63,2936.34 1983.07,2936.34 2409.72,2936.35 2410.14,2935.93 2446.48,2935.93 *1.71@2449.88,2932.52
  Bottom Layer w5: USBC1.B6@1497.43,2964.53 1466.53,2964.53 1458,2956 1458,2932 1464.84,2925.16 USBC1.A6@1497.43,2925.16 1514.17,2925.16 1519.02,2930.01 1540.49,2930.01 1546.82,2936.34 1553.73,2936.34 1561.07,2929 v1(1564,2929)
VBAT: *1.6 P8.2 | length 1284.3
  Top Layer w10: v1(2995,2953) 2995.4,2952.6 3059.72,2952.6 *1.6@3060.12,2952.2
  Top Layer w30: v1(2389,2701) 2388.9,2700.9 P8.2@2388.9,2308 P8.2@2419.17,2338.28
  Bottom Layer w10: v1(2389,2701) 2389,2825 2517,2953 v1(2995,2953)
VBUS: U27.2 USBC1.A4 USBC1.A9 USBC1.B4 USBC1.B9 | length 1495.8
  Top Layer w24: v3(1877,3218) 1951.88,3218 2232.02,3498.14 U27.2@2232.02,3810.91
  Bottom Layer w12: USBC1.B4@1497.43,3023.58 USBC1.B4@1497.53,3023.68 ; USBC1.A9@1497.43,3035.39 USBC1.A9@1497.53,3035.3
  Bottom Layer w18: 1474,2841 1467.16,2841 1439,2869.16 1439,3000.85 1469.15,3031 USBC1.A9@1507,3031
  Bottom Layer w22: USBC1.B4@1502.53,3028.68 1528.68,3028.68 1675,3175 1833.49,3175 1876.49,3218 v3(1877,3218)
VCCA: *1.21 C11.2 C12.2 R9.1 R10.1 | length 305.9
  Top Layer w10: *1.21@3060.12,3247.48 3116.48,3247.48 3125,3256 R10.1@3174.32,3256 ; R10.1@3174.32,3260 R10.1@3174.32,3256 ; R9.1@3174.32,3427 3174.32,3374.87 C11.2@3182.19,3367 3174.31,3359.13 C12.2@3174.31,3304 ; C12.2@3179.04,3308.72 C12.2@3174.31,3304 ; R10.1@3174.32,3256 C12.2@3174.31,3304
VSYS: U27.14 U32.11 | length 116.4
  Top Layer w25: U32.11@2018,4906 2020.83,4908.83 2129.2,4908.83 U27.14@2132.02,4911.65
pads on no net: P8.11 SW1.3 TF1.0 U11.7 U11.8 U12.1 U12.2 U22.3 U22.4 U23.5 U23.6 U24.3 U24.4 U27.3 U27.4 U27.5 U30.1 U30.2 U31.4 U33.1 U33.2 U33.3 U33.4 U33.5 U33.6 U33.7 U33.12 U33.14 U33.15 U33.16 U33.17 U33.19 U33.20 U33.22 USBC1. USBC1.A8 USBC1.B8
copper on no net:
  other v2: 1487.99,1314.45 3722.44,1321.14 2550,2133.74 1506.5,3284.72 3962.6,3285.71 1529.33,3439.84 3932.87,3440.43 1507.09,4091.81 3962.6,4091.81
  other v5: 1406.5,2555.59 4077.36,2693.39

## Polygon pours and split planes (outlines as drawn)
GND on Top Layer "l" (solid, remove dead copper, pour order 2): 3147,2275 3275,2275 3294,2256 3294,2224 3147,2224
+3 on Top Layer "l" (solid, remove dead copper, pour order 0): 3147,2214 3235,2214 3235,2160 3147,2160
+3 on Layer 1 (split plane): 4219.9,1095.1 1265.1,1095.1 1265.1,4963.9 4219.9,4963.9
GND on Layer 2 (split plane): 4219.9,1095.1 1265.1,1095.1 1265.1,4963.9 4219.9,4963.9

## Silkscreen, mask and mechanical layers (free items; w line width, h text height)
Top Overlay:
  lines w5.91: 1482,4723 1597,4723 1597,4818 1482,4818 1482,4723
  lines w6: 2459,1129 1775,1129 1775,1424 2460,1424 2460,1130 ; 3123,3683 3124,3684 ; 3360,1980 3360,2125 3360,2437 3460,2437 3460,1980 3360,1980
  lines w11.81: 1755,1112 2478,1112 2478,1444 1755,1444 1755,1112
  text "2.2nF" at 1467,4846 h39.37
  text "104" at 1704,4723 h39.37 r90
  text "GND" at 2974.89,4654 h39.37 r90
  text "MOSI" at 3075.08,4654 h39.37 r90
  text "MISO" at 3175.26,4654 h39.37 r90
  text "SCK" at 3275.45,4654 h39.37 r90
  text "NSS" at 3375.63,4654 h39.37 r90
  text "2RX" at 3475.82,4654 h39.37 r90
  text "2TX" at 3576,4654 h39.37 r90
  text "PWR" at 3681.71,4654 h39.37 r90
  text "MOTOR" at 3912,4648 h39.37 r90
  text "10nF" at 1468,4636 h39.37
  text "104" at 1646,4636 h39.37
  text "GND" at 4104,4548 h39.37
  text "LED" at 3719,4456 h39.37
  text "PWR" at 3976,4359.5 h39.37
  text "1K" at 3677,4339 h39.37
  text "PMOSx4" at 3257,4271 h39.37
  text "C3 MIC" at 3864,4259 h39.37
  text "1K" at 3779,4066 h39.37
  text "100Kx4" at 3152,4047 h39.37 r90
  text "SI2301" at 3235.32,4040.24 h39.37
  text "GND" at 3987,3984 h39.37
  text "A1RX" at 3954.2,3883 h39.37
  text "A0TX" at 3947.64,3782 h39.37
  text "1M" at 3780,3727 h39.37
  text "VCC" at 3987,3681 h39.37
  text "100Kx9" at 3668,3559 h39.37 r90
  text "104" at 2510.8,3504.56 h39.37 r90
  text "2u2" at 2700,3498 h39.37 r90
  text "104" at 3066,3470 h39.37 r90
  text "UART4" at 4186,3441 h39.37 r90
  text "MB" at 3246,3404 h39.37
  text "4u7" at 3278,3342 h39.37
  text "104" at 3234,3277 h39.37
  text "1p5 / ESD" at 3596,3274 h39.37
  text "100Kx10" at 1751,3256 h39.37
  text "MB" at 3235,3217 h39.37
  text "MB" at 3237,3160 h39.37
  text "KEY D15" at 1852.72,3115.72 h39.37
  text "RESET" at 3752,3110 h39.37
  text "47K" at 3147,3052 h39.37
  text "8px2" at 3657,3041 h39.37 r90
  text "ESD / 1K / 22R / 22R" at 2138,2985 h39.37
  text "104" at 3151,2963 h39.37
  text "22Rx2" at 1857.72,2866.72 h39.37
  text "5K1 / ESD / ESD / 5K1" at 1708,2828 h39.37
  text "1p5x2" at 3618,2776 h39.37 r90
  text "2u2 / 104" at 2228,2668 h39.37
  text "1K" at 2021.37,2657.6 h43.31
  text "104" at 3062.3,2601.71 h39.37 r90
  text "10K" at 2926,2598 h39.37 r90
  text "22Rx4" at 2486.04,2549.25 h39.37
  text "47K" at 3348.28,2308.72 h43.31 r90
  text "4u7 / 104" at 3132.34,2171.82 h39.37 r90
  text "47K" at 3346.67,2007.9 h43.31 r90
  text "1K" at 3379.29,1856.86 h43.31
  text "VSYS" at 2924.47,1818.96 h43.31
  text "1K" at 3267.72,1758.72 h43.31
  text "GND" at 1441.04,1747.06 h43.31
  text "SWCLK" at 1441.04,1646.72 h43.31
  text "SWDIO" at 1441.04,1546.39 h43.31
  text "VCC" at 1441.04,1446.06 h43.31
  text "SDIO / C8  D0 / C9  D1 / C10 D2 / C11 D3 / C12 CLK / D2  CMD / C13 DET" at 3608,1380 h43.31
  text "Super" at 1784,1249 h94.49
  text "https://madliar.com/gamekun" at 2530.81,1141.87 h51.18
  text "GameKUN" at 1779,1131 h94.49
Mechanical 13:
  the board outline again, w5.91

## Text inside footprints (layer, text, board x,y; h text height)
P8: Top Overlay "+" at 2406.57,2369.03 h60
TF1: Top Overlay "1" at 3635,2331.98 h30 r90; Top Overlay "2" at 3635,2288.98 h30 r90; Top Overlay "3" at 3635,2246.98 h30 r90; Top Overlay "4" at 3635,2199.98 h30 r90; Top Overlay "5" at 3635,2157.98 h30 r90; Top Overlay "6" at 3635,2115.98 h30 r90; Top Overlay "7" at 3635,2073.98 h30 r90; Top Overlay "8" at 3635,2029.98 h30 r90; Top Overlay "k" at 3635,1980 h30 r90
U1: Top Overlay "HERE IS BACK" at 2360.24,4118.03 h60